# EAGLE board THAPMU _1.0 (EAGLE 9.6.2)
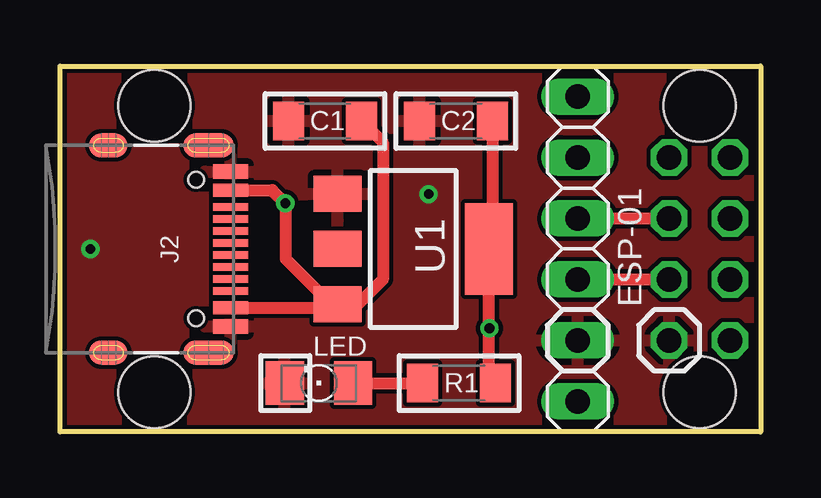
[diagram p0: board, top side]
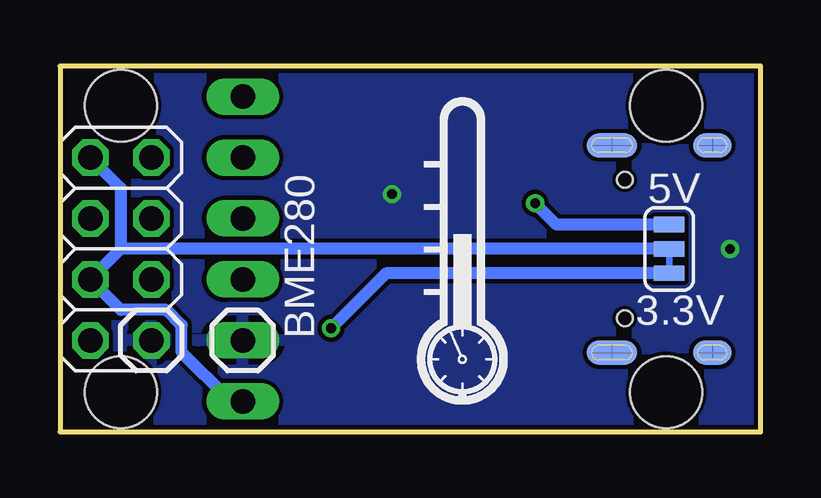
[diagram p1: board, bottom side, seen from below]

Size 29.21 x 15.24 mm. Coordinates in mm from the lower left corner, seen from the top.
Outline: 29.21,0 0,0 0,15.24 29.21,15.24 29.21,0
Copper layers (1*16): Top 0.035mm / dielectric 1.5mm / Bottom 0.035mm
Design rules "default *": minimum track width 7mil, minimum drill 15mil, track to track 7mil, track to pad 7mil, pad to pad 7mil, via to via 7mil, smd to smd 7mil, copper to edge 7mil, drill to drill 7mil, minimum pad ring 7mil, minimum via ring 7mil, stop-mask expansion 4mil, vias tented up to drill 25mil, thermal gap 10mil
Net classes: 1 power: width 0.178 mm
Holes 3 mm at 3.94,13.59 3.94,1.65 26.67,13.59 26.67,1.65

## Footprints (pad centres in the part's own frame; a part is rotated, then mirrored left to right if it is on the bottom)
1X06 = drill 1.016 long: 1 -6.35,0; 2 -3.81,0; 3 -1.27,0; 4 1.27,0; 5 3.81,0; 6 6.35,0
C1206 = smd 1.3 x 1.6: 1 -1.524,0; 2 1.524,0
2X04 = drill 1.016 octagon: 1 -3.81,-1.27; 2 -3.81,1.27; 3 -1.27,-1.27; 4 -1.27,1.27; 5 1.27,-1.27; 6 1.27,1.27; 7 3.81,-1.27; 8 3.81,1.27
USB-C-16P = smd 0.3 x 1.45: A5 -1.25,0; A6 -0.25,0; A7 0.25,0; A8 1.25,0; B5 1.75,0; B6 0.75,0; B7 -0.75,0; B8 -1.75,0 | smd 0.6 x 1.45: GND -3.225,0; GND2 3.225,0 | smd 1 x 2.1: SHLD1 -4.32,-0.915; SHLD2 4.32,-0.915 | smd 1 x 2.1 bottom: SHLD3 -4.32,-0.915; SHLD4 4.32,-0.915 | smd 1 x 1.6: SHLD5 -4.32,-5.095; SHLD8 4.32,-5.095 | smd 1 x 1.6 bottom: SHLD6 -4.32,-5.095; SHLD7 4.32,-5.095 | smd 0.55 x 1.45: VBUS1 -2.45,0; VBUS2 2.45,0 | hole 0.65: -2.89,-1.445; 2.89,-1.445
SMT-JUMPER_3_1-NC_TRACE_SILK = smd 0.635 x 1.27: 1 -1.016,0; 2 0,0; 3 1.016,0
1206 = smd 1.6 x 1.803: A -1.422,0; C 1.422,0
R1206 = smd 1.3 x 1.6: 1 -1.524,0; 2 1.524,0
SOT223 = smd 1.5 x 2: 1 -2.3,-3.15; 2 0,-3.15; 3 2.3,-3.15 | smd 3.8 x 2: 4 0,3.15

## Placement (x,y rotation side)
BME280  [1X06]  21.59,7.62 270 top
C1  0.1µF  [C1206]  11.05,12.95 0 top
C2  10µF  [C1206]  16.51,12.95 0 top
ESP-01  [2X04]  26.67,7.62 90 bottom
J2  [USB-C-16P]  7.11,7.62 270 top
JP1  [SMT-JUMPER_3_1-NC_TRACE_SILK]  3.81,7.62 270 bottom
LED  [1206]  10.79,2.03 180 top
LOGO  [THAPMU]  12.45,8.26 0 top
R1  1k  [R1206]  16.64,2.03 0 top
U1  LD1117AS33TR  [SOT223]  14.73,7.62 270 top

## Library data of the parts
BME280 ESP-01 = pinhead
C1 C2 LOGO R1 = TheLibrary
J2 = SparkFun-Connectors; PROD_ID: CONN-14122
JP1 = SparkFun-Jumpers
LED = led
U1 = v-reg

## Nets
3.3V [power]: C2.2 JP1.3 R1.2 U1.4
5V: C1.2 J2.VBUS1 J2.VBUS2 JP1.1 U1.3
CSB: BME280.2
GND [power]: BME280.5 C1.1 C2.1 ESP-01.1 J2.GND J2.GND2 LED.C U1.1
GPIO0: BME280.3 ESP-01.5
GPIO2: BME280.4 ESP-01.3
N$2: LED.A R1.1
RST: ESP-01.6
RXI: ESP-01.2
SD0: BME280.1
SHLD: J2.SHLD1 J2.SHLD2 J2.SHLD3 J2.SHLD4 J2.SHLD5 J2.SHLD6 J2.SHLD7 J2.SHLD8
TXO: ESP-01.7
VCC: BME280.6 ESP-01.4 ESP-01.8 JP1.2

## Tracks (layer width: path | path; a pad name or v marks a point on that pad's centre or on a via)
3.3V  (via drill 0.4)
  Top 0.508: C2.2 18.03,7.77 U1.4 17.88,4.34 | 17.88,4.34 17.88,2.18 18.03,2.03 R1.2 | v17.91,4.32 17.88,4.34
  Bottom 0.508: JP1.3 15.62,6.6 v17.91,4.32
5V  (via drill 0.4)
  Top 0.508: J2.VBUS2 10.92,5.17 | 10.92,5.17 11.43,5.17 | 11.43,5.17 U1.3 | J2.VBUS1 8.85,10.07 v9.4,9.53 9.41,9.51 9.41,7.21 10.92,5.7 10.92,5.17 | C1.2 13.46,12.06 13.46,6.35 12.28,5.17 11.43,5.17
  Bottom 0.508: JP1.1 8.51,8.64 v9.4,9.53
GND  (via drill 0.4)
  Top 0.508: 11.16,9.92 U1.1
  other vias: 15.37,9.91 1.27,7.62
  pour Top: 0,15.24 29.21,15.24 29.21,0 0,0
  pour Bottom: 0,15.24 29.21,15.24 29.21,0 0,0
GPIO0
  Top 0.508: BME280.3 ESP-01.5
GPIO2
  Top 0.508: BME280.4 ESP-01.3
N$2
  Top 0.508: LED.A R1.1
VCC
  Bottom 0.508: BME280.6 21.59,1.37 22.2,1.37 24.13,3.3 24.13,4.45 24.77,5.08 26.67,5.08 ESP-01.4 26.67,7.62 | ESP-01.8 26.67,10.16 26.67,7.62 | JP1.2 26.67,7.62

## Text on the board
bNames: 5V | 3.3V